# Altium PCB Filter_Main2.PcbDoc (part 2 of 2)
Units mm, origin at the board's own origin, x right, y up, seen from the top; angles counter-clockwise.
Board outline 175 x 90 mm, 2 copper layers (Top Layer, Bottom Layer); 103 components, 61 nets, 291 pads, 1 vias.
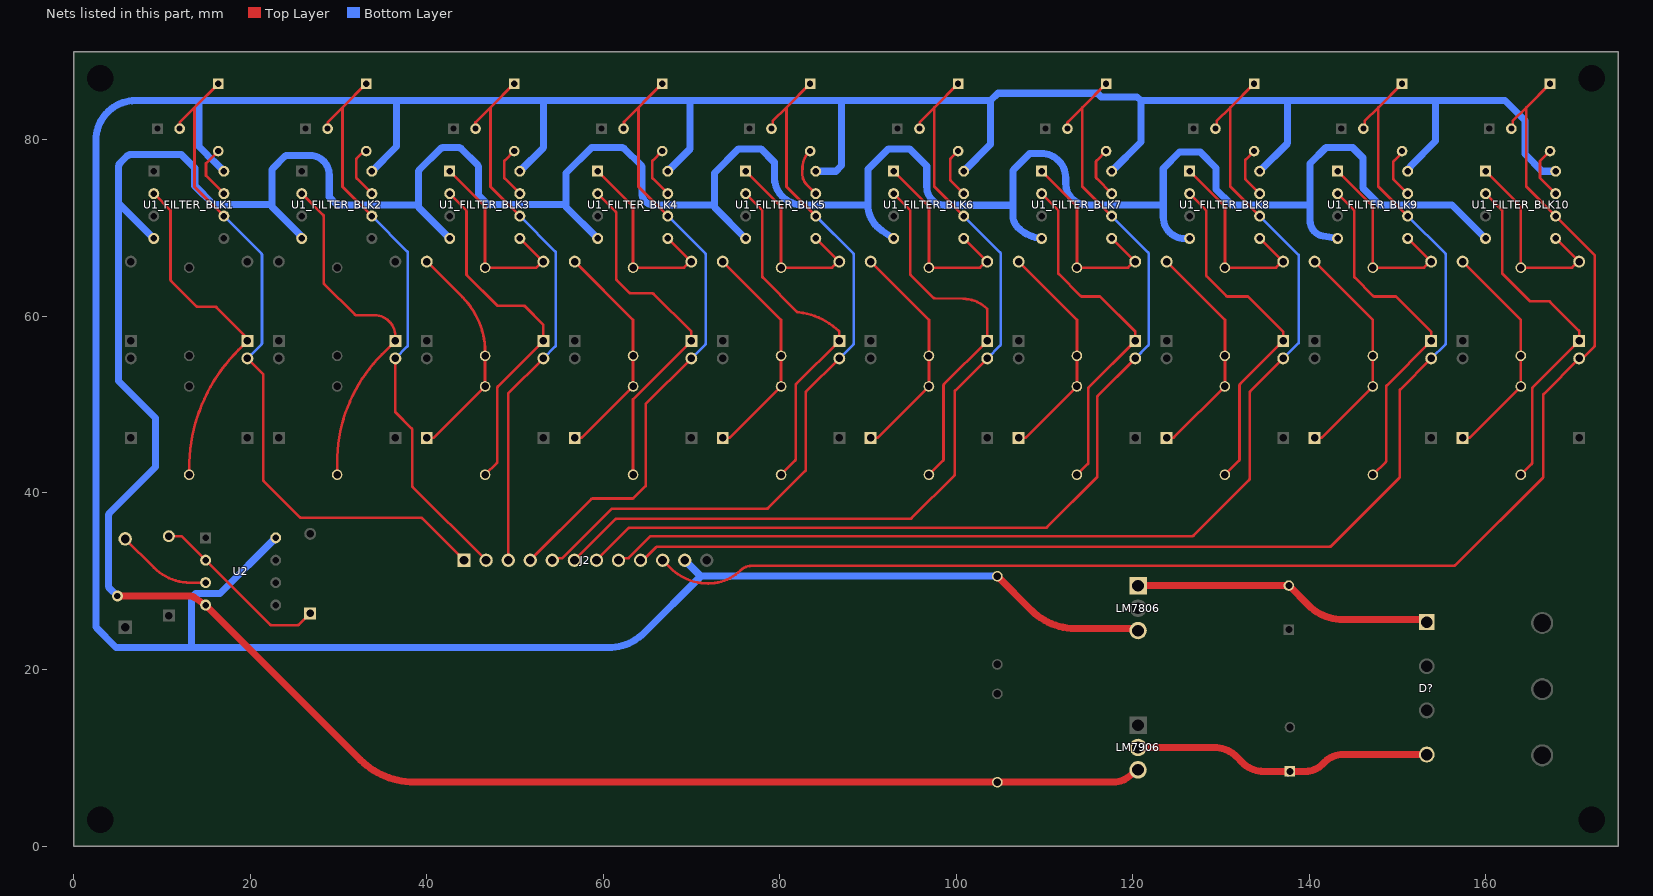
[diagram p2: the nets of this part, all layers, seen from the top]

## Via types
v1: diameter 1.27, hole 0.711, Top Layer to Bottom Layer, 1 vias

## Nets (pads, with @x,y where several pads share a name; then routed paths per layer and width w, separated by ;. In a path a pad name is that pad's centre, name@x,y a point inside that pad or via, vN(x,y) a via of type N, cw(c..) or ccw(c..) an arc to the next point about the centre after c; other vN are vias at no path point) (continued)
NetC1_FILTER_BLK3_1: C1_FILTER_BLK3.1 C2_FILTER_BLK3.1 R2_FILTER_BLK3.2 R3_FILTER_BLK3.1 | length 25.5
  Top Layer w0.3: R3_FILTER_BLK3.1@40.005,46.245 40.703,46.245 ccw(c40.703,46.439) 40.841,46.302 C2_FILTER_BLK3.1@46.609,52.07 46.609,55.989 ccw(c37.848,55.989) 44.042,62.185 ; R2_FILTER_BLK3.2@40.005,66.222 44.042,62.185
NetC1_FILTER_BLK3_2: C1_FILTER_BLK3.2 R1_FILTER_BLK3.2 U1_FILTER_BLK3.1 U1_FILTER_BLK3.5 | length 23.2
  Top Layer w0.3: U1_FILTER_BLK3.1@42.606,76.454 46.609,72.451 C1_FILTER_BLK3.2@46.609,65.532 52.41,65.532 53.1,66.222 R1_FILTER_BLK3.2@53.213,66.222 53.186,66.222 50.574,68.834 U1_FILTER_BLK3.5@50.546,68.834
NetC1_FILTER_BLK4_1: C1_FILTER_BLK4.1 C2_FILTER_BLK4.1 R2_FILTER_BLK4.2 R3_FILTER_BLK4.1 | length 25.9
  Top Layer w0.3: R3_FILTER_BLK4.1@56.769,46.245 57.467,46.245 ccw(c57.467,46.439) 57.605,46.302 C2_FILTER_BLK4.1@63.373,52.07 C1_FILTER_BLK4.1@63.373,55.532 63.373,59.618 R2_FILTER_BLK4.2@56.769,66.222
NetC1_FILTER_BLK4_2: C1_FILTER_BLK4.2 R1_FILTER_BLK4.2 U1_FILTER_BLK4.1 U1_FILTER_BLK4.5 | length 23.2
  Top Layer w0.3: U1_FILTER_BLK4.1@59.37,76.454 63.373,72.451 C1_FILTER_BLK4.2@63.373,65.532 69.174,65.532 69.864,66.222 R1_FILTER_BLK4.2@69.977,66.222 69.95,66.222 67.338,68.834 U1_FILTER_BLK4.5@67.31,68.834
NetC1_FILTER_BLK5_1: C1_FILTER_BLK5.1 C2_FILTER_BLK5.1 R2_FILTER_BLK5.2 R3_FILTER_BLK5.1 | length 25.9
  Top Layer w0.3: R3_FILTER_BLK5.1@73.533,46.245 74.231,46.245 ccw(c74.231,46.439) 74.369,46.302 C2_FILTER_BLK5.1@80.137,52.07 C1_FILTER_BLK5.1@80.137,55.532 80.137,59.618 R2_FILTER_BLK5.2@73.533,66.222
NetC1_FILTER_BLK5_2: C1_FILTER_BLK5.2 R1_FILTER_BLK5.2 U1_FILTER_BLK5.1 U1_FILTER_BLK5.5 | length 23.2
  Top Layer w0.3: U1_FILTER_BLK5.1@76.134,76.454 80.137,72.451 C1_FILTER_BLK5.2@80.137,65.532 85.938,65.532 86.628,66.222 R1_FILTER_BLK5.2@86.741,66.222 86.714,66.222 84.102,68.834 U1_FILTER_BLK5.5@84.074,68.834
NetC1_FILTER_BLK6_1: C1_FILTER_BLK6.1 C2_FILTER_BLK6.1 R2_FILTER_BLK6.2 R3_FILTER_BLK6.1 | length 25.9
  Top Layer w0.3: R3_FILTER_BLK6.1@90.297,46.245 90.995,46.245 ccw(c90.995,46.439) 91.133,46.302 C2_FILTER_BLK6.1@96.901,52.07 C1_FILTER_BLK6.1@96.901,55.532 96.901,59.618 R2_FILTER_BLK6.2@90.297,66.222
NetC1_FILTER_BLK6_2: C1_FILTER_BLK6.2 R1_FILTER_BLK6.2 U1_FILTER_BLK6.1 U1_FILTER_BLK6.5 | length 23.2
  Top Layer w0.3: U1_FILTER_BLK6.1@92.898,76.454 96.901,72.451 C1_FILTER_BLK6.2@96.901,65.532 102.702,65.532 103.392,66.222 R1_FILTER_BLK6.2@103.505,66.222 103.478,66.222 100.866,68.834 U1_FILTER_BLK6.5@100.838,68.834
NetC1_FILTER_BLK7_1: C1_FILTER_BLK7.1 C2_FILTER_BLK7.1 R2_FILTER_BLK7.2 R3_FILTER_BLK7.1 | length 25.9
  Top Layer w0.3: R3_FILTER_BLK7.1@107.061,46.245 107.759,46.245 ccw(c107.759,46.439) 107.897,46.302 C2_FILTER_BLK7.1@113.665,52.07 C1_FILTER_BLK7.1@113.665,55.532 113.665,59.618 R2_FILTER_BLK7.2@107.061,66.222
NetC1_FILTER_BLK7_2: C1_FILTER_BLK7.2 R1_FILTER_BLK7.2 U1_FILTER_BLK7.1 U1_FILTER_BLK7.5 | length 23.2
  Top Layer w0.3: U1_FILTER_BLK7.1@109.662,76.454 113.665,72.451 C1_FILTER_BLK7.2@113.665,65.532 119.466,65.532 120.156,66.222 R1_FILTER_BLK7.2@120.269,66.222 120.242,66.222 117.63,68.834 U1_FILTER_BLK7.5@117.602,68.834
NetC1_FILTER_BLK8_1: C1_FILTER_BLK8.1 C2_FILTER_BLK8.1 R2_FILTER_BLK8.2 R3_FILTER_BLK8.1 | length 25.9
  Top Layer w0.3: R3_FILTER_BLK8.1@123.825,46.245 124.35,46.261 124.552,46.267 ccw(c124.545,46.461) 124.682,46.323 C2_FILTER_BLK8.1@130.429,52.07 C1_FILTER_BLK8.1@130.429,55.532 130.429,59.618 R2_FILTER_BLK8.2@123.825,66.222
NetC1_FILTER_BLK8_2: C1_FILTER_BLK8.2 R1_FILTER_BLK8.2 U1_FILTER_BLK8.1 U1_FILTER_BLK8.5 | length 23.2
  Top Layer w0.3: U1_FILTER_BLK8.1@126.426,76.454 130.429,72.451 C1_FILTER_BLK8.2@130.429,65.532 136.23,65.532 136.92,66.222 R1_FILTER_BLK8.2@137.006,66.222 ; U1_FILTER_BLK8.5@134.366,68.834 134.394,68.834 R1_FILTER_BLK8.2@137.006,66.222 ; R1_FILTER_BLK8.2@137.033,66.222 R1_FILTER_BLK8.2@137.006,66.222
NetC1_FILTER_BLK9_1: C1_FILTER_BLK9.1 C2_FILTER_BLK9.1 R2_FILTER_BLK9.2 R3_FILTER_BLK9.1 | length 25.9
  Top Layer w0.3: R3_FILTER_BLK9.1@140.589,46.245 141.287,46.245 ccw(c141.287,46.439) 141.425,46.302 C2_FILTER_BLK9.1@147.193,52.07 C1_FILTER_BLK9.1@147.193,55.532 147.193,59.618 R2_FILTER_BLK9.2@140.589,66.222
NetC1_FILTER_BLK9_2: C1_FILTER_BLK9.2 R1_FILTER_BLK9.2 U1_FILTER_BLK9.1 U1_FILTER_BLK9.5 | length 23.2
  Top Layer w0.3: U1_FILTER_BLK9.1@143.19,76.454 147.193,72.451 C1_FILTER_BLK9.2@147.193,65.532 152.994,65.532 153.684,66.222 R1_FILTER_BLK9.2@153.797,66.222 153.77,66.222 151.158,68.834 U1_FILTER_BLK9.5@151.13,68.834
NetC1_FILTER_BLK10_1: C1_FILTER_BLK10.1 C2_FILTER_BLK10.1 R2_FILTER_BLK10.2 R3_FILTER_BLK10.1 | length 25.9
  Top Layer w0.3: R3_FILTER_BLK10.1@157.353,46.245 158.051,46.245 ccw(c158.051,46.439) 158.189,46.302 C2_FILTER_BLK10.1@163.957,52.07 C1_FILTER_BLK10.1@163.957,55.532 163.957,59.618 R2_FILTER_BLK10.2@157.353,66.222
NetC1_FILTER_BLK10_2: C1_FILTER_BLK10.2 R1_FILTER_BLK10.2 U1_FILTER_BLK10.1 U1_FILTER_BLK10.5 | length 23.2
  Top Layer w0.3: U1_FILTER_BLK10.1@159.954,76.454 163.957,72.451 C1_FILTER_BLK10.2@163.957,65.532 169.758,65.532 170.448,66.222 R1_FILTER_BLK10.2@170.561,66.222 170.534,66.222 167.922,68.834 U1_FILTER_BLK10.5@167.894,68.834
NetC2_FILTER_BLK1_2: C2_FILTER_BLK1.2 R1_FILTER_BLK1.1 U1_FILTER_BLK1.2 | length 39.7
  Top Layer w0.3: U1_FILTER_BLK1.2@9.345,73.684 ccw(c9.15,73.674) 9.225,73.853 U1_FILTER_BLK1.2@9.078,73.914 10.971,72.021 10.971,64.165 ccw(c11.166,64.166) 11.028,64.029 13.914,61.143 ccw(c14.051,61.281) 14.049,61.087 16.048,61.087 cw(c16.048,60.893) 16.186,61.03 19.469,57.747 R1_FILTER_BLK1.1@19.685,57.222 18.657,56.194 ccw(c32.119,42.732) 13.081,42.731 C2_FILTER_BLK1.2@13.081,42.07
NetC2_FILTER_BLK2_2: C2_FILTER_BLK2.2 R1_FILTER_BLK2.1 U1_FILTER_BLK2.2 | length 39.8
  Top Layer w0.3: U1_FILTER_BLK2.2@25.842,73.914 28.264,71.501 cw(c28.127,71.363) 28.321,71.363 28.321,63.834 ccw(c28.515,63.835) 28.377,63.698 31.877,60.198 ccw(c32.014,60.335) 32.014,60.141 34.055,60.141 cw(c34.055,57.747) 36.449,57.747 R1_FILTER_BLK2.1@36.449,57.222 34.935,55.708 ccw(c47.223,43.42) 29.845,43.419 C2_FILTER_BLK2.2@29.845,42.07
NetC2_FILTER_BLK3_2: C2_FILTER_BLK3.2 R1_FILTER_BLK3.1 U1_FILTER_BLK3.2 | length 40.7
  Top Layer w0.3: U1_FILTER_BLK3.2@42.606,73.914 44.443,72.077 cw(c44.305,71.94) 44.499,71.94 44.499,64.801 ccw(c44.694,64.801) 44.556,64.664 47.949,61.271 ccw(c48.087,61.408) 48.087,61.214 50.973,61.214 cw(c50.973,61.02) 51.111,61.157 53.156,59.112 cw(c53.019,58.974) 53.213,58.974 R1_FILTER_BLK3.1@53.213,57.222 48.063,52.072 ccw(c48.2,51.934) 48.006,51.934 48.006,43.548 cw(c47.812,43.548) 47.949,43.41 C2_FILTER_BLK3.2@46.609,42.07
NetC2_FILTER_BLK4_2: C2_FILTER_BLK4.2 R1_FILTER_BLK4.1 U1_FILTER_BLK4.2 | length 40.5
  Top Layer w0.3: U1_FILTER_BLK4.2@59.37,73.914 61.411,71.873 cw(c61.274,71.735) 61.468,71.735 61.468,64.263 ccw(c61.662,64.263) 61.525,64.126 62.982,62.668 ccw(c63.12,62.805) 63.12,62.611 65.563,62.611 cw(c65.563,62.417) 65.701,62.554 69.977,58.278 R1_FILTER_BLK4.1@69.977,57.222 63.373,50.618 C2_FILTER_BLK4.2@63.373,42.07
NetC2_FILTER_BLK5_2: C2_FILTER_BLK5.2 R1_FILTER_BLK5.1 U1_FILTER_BLK5.2 | length 40.1
  Top Layer w0.3: U1_FILTER_BLK5.2@76.134,73.914 77.971,72.077 cw(c77.833,71.94) 78.027,71.94 78.027,64.546 ccw(c78.222,64.547) 78.084,64.41 81.966,60.528 ccw(c82.103,60.666) 82.082,60.473 82.181,60.462 cw(c81.375,52.926) 86.683,58.335 cw(c86.547,58.197) 86.741,58.197 R1_FILTER_BLK5.1@86.741,57.222 81.845,52.326 ccw(c81.982,52.188) 81.788,52.188 81.788,43.802 cw(c81.594,43.802) 81.731,43.664 C2_FILTER_BLK5.2@80.137,42.07
NetC2_FILTER_BLK6_2: C2_FILTER_BLK6.2 R1_FILTER_BLK6.1 U1_FILTER_BLK6.2 | length 41.6
  Top Layer w0.3: U1_FILTER_BLK6.2@92.898,73.914 94.735,72.077 cw(c94.597,71.94) 94.791,71.94 94.791,64.8 ccw(c94.986,64.801) 94.848,64.664 97.408,62.104 ccw(c97.545,62.242) 97.54,62.048 ; C2_FILTER_BLK6.2@96.901,42.07 98.495,43.664 ccw(c98.358,43.802) 98.552,43.802 98.552,52.188 cw(c98.746,52.188) 98.609,52.326 R1_FILTER_BLK6.1@103.505,57.222 103.505,60.752 ccw(c103.311,60.752) 103.448,60.89 ccw(c100.778,58.202) 100.769,61.991 cw(c100.769,62.185) 100.765,61.991 97.541,62.048
NetC2_FILTER_BLK7_2: C2_FILTER_BLK7.2 R1_FILTER_BLK7.1 U1_FILTER_BLK7.2 | length 40.2
  Top Layer w0.3: U1_FILTER_BLK7.2@109.662,73.914 111.499,72.077 cw(c111.361,71.94) 111.555,71.94 111.555,64.928 ccw(c111.75,64.928) 111.612,64.791 114.08,62.323 ccw(c114.217,62.461) 114.217,62.266 116.281,62.266 120.269,58.278 R1_FILTER_BLK7.1@120.269,57.222 114.992,51.945 ccw(c115.129,51.807) 114.935,51.807 114.935,43.421 cw(c114.741,43.421) 114.878,43.283 C2_FILTER_BLK7.2@113.665,42.07
NetC2_FILTER_BLK8_2: C2_FILTER_BLK8.2 R1_FILTER_BLK8.1 U1_FILTER_BLK8.2 | length 40.3
  Top Layer w0.3: U1_FILTER_BLK8.2@126.426,73.914 128.263,72.077 cw(c128.125,71.94) 128.319,71.94 128.319,64.674 ccw(c128.514,64.674) 128.376,64.537 130.59,62.323 ccw(c130.727,62.461) 130.727,62.266 133.045,62.266 137.033,58.278 R1_FILTER_BLK8.1@137.033,57.222 132.137,52.326 ccw(c132.274,52.188) 132.08,52.188 132.08,43.802 cw(c131.886,43.802) 132.023,43.664 C2_FILTER_BLK8.2@130.429,42.07
NetC2_FILTER_BLK9_2: C2_FILTER_BLK9.2 R1_FILTER_BLK9.1 U1_FILTER_BLK9.2 | length 40.4
  Top Layer w0.3: U1_FILTER_BLK9.2@143.19,73.914 145.027,72.077 cw(c144.889,71.94) 145.083,71.94 145.083,64.547 ccw(c145.278,64.547) 145.14,64.41 147.227,62.323 ccw(c147.364,62.461) 147.364,62.266 149.809,62.266 153.797,58.278 R1_FILTER_BLK9.1@153.797,57.222 148.774,52.199 ccw(c148.911,52.061) 148.717,52.061 148.717,43.675 cw(c148.523,43.675) 148.66,43.537 C2_FILTER_BLK9.2@147.193,42.07
NetC2_FILTER_BLK10_2: C2_FILTER_BLK10.2 R1_FILTER_BLK10.1 U1_FILTER_BLK10.2 | length 40.2
  Top Layer w0.3: U1_FILTER_BLK10.2@159.954,73.914 161.791,72.077 cw(c161.653,71.94) 161.847,71.94 161.847,64.928 ccw(c162.042,64.928) 161.904,64.791 164.916,61.779 ccw(c165.054,61.916) 165.054,61.722 167.132,61.722 cw(c167.132,61.528) 167.269,61.665 170.504,58.43 cw(c170.367,58.293) 170.561,58.293 R1_FILTER_BLK10.1@170.561,57.222 165.284,51.945 ccw(c165.421,51.807) 165.227,51.808 165.227,43.421 cw(c165.033,43.421) 165.17,43.283 C2_FILTER_BLK10.2@163.957,42.07
NetCE1_2: CE1.2 D?.1 LM7806.1 | length 34.2
  Top Layer w0.8: LM7806.1@120.587,29.483 120.601,29.497 137.654,29.497 CE1.2@137.668,29.511 139.895,27.284 ccw(c140.463,27.848) 139.898,27.281 139.899,27.28 ccw(c143.843,31.25) 143.827,25.654 152.789,25.654 D?.1@153.289,25.367 ; LM7806.1@120.904,29.454 LM7806.1@120.933,29.482
NetCE2_1: CE2.1 D?.4 LM7906.2 | length 34.4
  Top Layer w0.8: LM7906.2@120.587,11.171 129.212,11.171 129.216,11.171 cw(c129.215,7.614) 131.731,10.128 131.732,10.127 132.391,9.468 132.394,9.465 ccw(c134.817,11.89) 134.819,8.462 137.995,8.462 139.554,8.462 ccw(c139.554,11.154) 141.455,9.248 141.703,9.496 cw(c143.81,7.383) 143.811,10.367 ; 143.812,10.367 D?.4@153.289,10.367
  Bottom Layer w0.8: CE2.1@137.588,8.255 CE2.1@137.795,8.462
NetD1_FILTER_BLK1_2: D1_FILTER_BLK1.2 U1_FILTER_BLK1.7 | length 6.2
  Top Layer w0.3: D1_FILTER_BLK1.2@16.383,78.737 14.986,77.34 14.986,75.946 U1_FILTER_BLK1.7@17.018,73.914
NetD1_FILTER_BLK2_2: D1_FILTER_BLK2.2 U1_FILTER_BLK2.7 | length 6.2
  Top Layer w0.3: D1_FILTER_BLK2.2@33.147,78.737 32.903,78.737 32.633,78.467 32.62,78.467 32.092,77.939 ccw(c32.304,77.727) 32.004,77.727 32.004,75.816 ccw(c32.304,75.816) 32.091,75.605 U1_FILTER_BLK2.7@33.782,73.914
NetD1_FILTER_BLK3_2: D1_FILTER_BLK3.2 U1_FILTER_BLK3.7 | length 6
  Top Layer w0.3: D1_FILTER_BLK3.2@49.911,78.737 48.856,77.682 ccw(c49.068,77.47) 48.768,77.47 48.768,75.816 ccw(c49.068,75.816) 48.855,75.605 U1_FILTER_BLK3.7@50.546,73.914
NetD1_FILTER_BLK4_2: D1_FILTER_BLK4.2 U1_FILTER_BLK4.7 | length 6
  Top Layer w0.3: D1_FILTER_BLK4.2@66.675,78.737 65.62,77.682 ccw(c65.832,77.47) 65.532,77.47 65.532,75.816 ccw(c65.832,75.816) 65.619,75.605 U1_FILTER_BLK4.7@67.31,73.914
NetD1_FILTER_BLK5_2: D1_FILTER_BLK5.2 U1_FILTER_BLK5.7 | length 5.6
  Top Layer w0.3: D1_FILTER_BLK5.2@83.447,78.727 ccw(c84.935,76.896) 82.576,76.977 cw(c82.277,76.986) 82.576,76.975 82.55,76.2 ccw(c84.259,76.147) 83.051,74.937 U1_FILTER_BLK5.7@84.074,73.914
NetD1_FILTER_BLK6_2: D1_FILTER_BLK6.2 U1_FILTER_BLK6.7 | length 5.8
  Top Layer w0.3: D1_FILTER_BLK6.2@100.203,78.737 99.402,77.936 ccw(c99.614,77.724) 99.314,77.724 99.314,75.562 ccw(c99.614,75.562) 99.401,75.351 U1_FILTER_BLK6.7@100.838,73.914
NetD1_FILTER_BLK7_2: D1_FILTER_BLK7.2 U1_FILTER_BLK7.7 | length 6
  Top Layer w0.3: D1_FILTER_BLK7.2@116.967,78.737 115.912,77.682 ccw(c116.124,77.47) 115.824,77.47 115.824,75.816 ccw(c116.124,75.816) 115.911,75.605 U1_FILTER_BLK7.7@117.602,73.914
NetD1_FILTER_BLK8_2: D1_FILTER_BLK8.2 U1_FILTER_BLK8.7 | length 5.9
  Top Layer w0.3: D1_FILTER_BLK8.2@133.731,78.737 132.803,77.809 ccw(c133.015,77.597) 132.715,77.597 132.715,75.689 ccw(c133.015,75.689) 132.802,75.478 U1_FILTER_BLK8.7@134.366,73.914
NetD1_FILTER_BLK9_2: D1_FILTER_BLK9.2 U1_FILTER_BLK9.7 | length 5.9
  Top Layer w0.3: D1_FILTER_BLK9.2@150.495,78.737 150.495,78.543 149.567,77.615 ccw(c149.779,77.403) 149.479,77.403 149.479,75.689 ccw(c149.779,75.689) 149.566,75.478 U1_FILTER_BLK9.7@151.13,73.914
NetD1_FILTER_BLK10_2: D1_FILTER_BLK10.2 U1_FILTER_BLK10.7 | length 6
  Top Layer w0.3: D1_FILTER_BLK10.2@167.259,78.737 166.116,77.594 166.116,75.692 U1_FILTER_BLK10.7@167.894,73.914
NetP_B1: P.B1 U2.3 | length 10.9
  Top Layer w0.3: P.B1@5.842,34.798 9.097,31.543 9.098,31.542 ccw(c13.195,35.64) 13.196,29.845 U2.3@14.953,29.845
NetR5_1: R5.1 R6.2 U2.2 | length 20.7
  Top Layer w0.3: R6.2@10.795,35.107 12.231,35.107 U2.2@14.953,32.385 22.262,25.076 ccw(c22.4,25.213) 22.4,25.019 25.374,25.019 ccw(c25.374,25.213) 25.512,25.076 R5.1@26.797,26.361
PI1: C3_FILTER_BLK1.2 D1_FILTER_BLK1.1 J2.1 R4_FILTER_BLK1.2 U1_FILTER_BLK1.6 | length 80.2
  Top Layer w0.3: C3_FILTER_BLK1.2@12.005,81.28 12.005,81.985 13.696,83.676 ; D1_FILTER_BLK1.1@16.383,86.363 13.696,83.676 ; U1_FILTER_BLK1.6@17.018,71.374 13.696,74.696 13.696,83.676 ; R4_FILTER_BLK1.2@19.685,55.245 21.463,53.467 21.463,41.482 ccw(c21.657,41.483) 21.519,41.346 25.598,37.267 ccw(c25.735,37.405) 25.733,37.211 39.322,37.211 cw(c39.322,37.017) 39.46,37.154 J2.1@44.229,32.385
  Bottom Layer w0.3: U1_FILTER_BLK1.6@17.018,71.374 21.279,67.113 cw(c21.142,66.975) 21.336,66.975 21.336,56.977 cw(c21.142,56.977) 21.279,56.839 R4_FILTER_BLK1.2@19.685,55.245
PI2: C3_FILTER_BLK2.2 D1_FILTER_BLK2.1 J2.2 R4_FILTER_BLK2.2 U1_FILTER_BLK2.6 | length 66
  Top Layer w0.3: C3_FILTER_BLK2.2@28.769,81.28 28.769,81.985 30.46,83.676 ; D1_FILTER_BLK2.1@33.147,86.363 30.46,83.676 ; U1_FILTER_BLK2.6@33.782,71.374 30.46,74.696 30.46,83.676 ; R4_FILTER_BLK2.2@36.449,55.245 36.449,49.229 ccw(c36.643,49.23) 36.506,49.092 38.297,47.301 cw(c38.16,47.163) 38.354,47.163 38.354,40.841 ccw(c38.548,40.841) 38.411,40.703 J2.2@46.729,32.385
  Bottom Layer w0.3: U1_FILTER_BLK2.6@33.782,71.374 37.789,67.367 cw(c37.652,67.229) 37.846,67.229 37.846,56.723 cw(c37.652,56.723) 37.789,56.585 R4_FILTER_BLK2.2@36.449,55.245
PI3: C3_FILTER_BLK3.2 D1_FILTER_BLK3.1 J2.3 R4_FILTER_BLK3.2 U1_FILTER_BLK3.6 | length 63.5
  Top Layer w0.3: C3_FILTER_BLK3.2@45.533,81.28 45.533,81.985 47.224,83.676 ; J2.3@49.229,32.385 49.229,51.261 R4_FILTER_BLK3.2@53.213,55.245 ; D1_FILTER_BLK3.1@49.911,86.363 47.224,83.676 ; U1_FILTER_BLK3.6@50.546,71.374 47.224,74.696 47.224,83.676
  Bottom Layer w0.3: U1_FILTER_BLK3.6@50.546,71.374 54.553,67.367 cw(c54.416,67.229) 54.61,67.229 54.61,56.723 cw(c54.416,56.723) 54.553,56.585 R4_FILTER_BLK3.2@53.213,55.245
PI4: C3_FILTER_BLK4.2 D1_FILTER_BLK4.1 J2.4 R4_FILTER_BLK4.2 U1_FILTER_BLK4.6 | length 72.2
  Top Layer w0.3: J2.4@51.729,32.385 58.657,39.313 cw(c58.795,39.176) 58.795,39.37 63.292,39.37 ccw(c63.292,39.564) 63.43,39.427 64.801,40.798 64.801,50.069 R4_FILTER_BLK4.2@69.977,55.245 ; C3_FILTER_BLK4.2@62.357,81.34 62.357,82.045 D1_FILTER_BLK4.1@66.675,86.363 ; 63.988,83.566 63.988,74.696 U1_FILTER_BLK4.6@67.31,71.374
  Top Layer w0.8: C3_FILTER_BLK4.2@62.297,81.28 C3_FILTER_BLK4.2@62.357,81.34
  Bottom Layer w0.3: U1_FILTER_BLK4.6@67.31,71.374 71.571,67.113 cw(c71.434,66.975) 71.628,66.975 71.628,56.977 cw(c71.434,56.977) 71.571,56.839 R4_FILTER_BLK4.2@69.977,55.245
PI5: C3_FILTER_BLK5.2 D1_FILTER_BLK5.1 J2.5 R4_FILTER_BLK5.2 U1_FILTER_BLK5.6 | length 86.3
  Top Layer w0.3: J2.5@54.229,32.385 54.469,32.625 55.364,32.625 60.909,38.17 cw(c61.046,38.033) 61.046,38.227 78.532,38.227 ccw(c78.532,38.421) 78.67,38.284 82.874,42.488 ccw(c82.737,42.626) 82.931,42.626 82.931,51.354 cw(c83.125,51.354) 82.988,51.492 R4_FILTER_BLK5.2@86.741,55.245 ; C3_FILTER_BLK5.2@79.061,81.28 79.199,81.418 79.199,82.123 80.752,83.676 ; D1_FILTER_BLK5.1@83.439,86.363 80.752,83.676 ; U1_FILTER_BLK5.6@84.074,71.374 80.752,74.696 80.752,83.676
  Bottom Layer w0.3: U1_FILTER_BLK5.6@84.074,71.374 88.335,67.113 cw(c88.198,66.975) 88.392,66.975 88.392,56.977 cw(c88.198,56.977) 88.335,56.839 R4_FILTER_BLK5.2@86.741,55.245
PI6: C3_FILTER_BLK6.2 D1_FILTER_BLK6.1 J2.6 R4_FILTER_BLK6.2 U1_FILTER_BLK6.6 | length 100.8
  Top Layer w0.3: J2.6@56.729,32.385 61.371,37.027 cw(c61.509,36.89) 61.509,37.084 94.788,37.084 ccw(c94.788,37.278) 94.926,37.141 99.765,41.98 ccw(c99.628,42.118) 99.822,42.118 99.822,51.481 cw(c100.016,51.481) 99.879,51.619 R4_FILTER_BLK6.2@103.505,55.245 ; C3_FILTER_BLK6.2@95.825,81.28 ccw(c95.644,81.352) 95.839,81.352 95.839,81.918 cw(c96.033,81.918) 95.896,82.056 97.516,83.676 ; D1_FILTER_BLK6.1@100.203,86.363 97.516,83.676 ; U1_FILTER_BLK6.6@100.838,71.374 97.516,74.696 97.516,83.676
  Bottom Layer w0.3: U1_FILTER_BLK6.6@100.838,71.374 104.972,67.24 cw(c104.835,67.102) 105.029,67.102 105.029,56.85 cw(c104.835,56.85) 104.972,56.712 R4_FILTER_BLK6.2@103.505,55.245
PI7: C3_FILTER_BLK7.2 D1_FILTER_BLK7.1 J2.7 R4_FILTER_BLK7.2 U1_FILTER_BLK7.6 | length 114.9
  Top Layer w0.3: J2.7@59.229,32.385 62.855,36.011 cw(c62.993,35.874) 62.993,36.068 110.155,36.068 ccw(c110.155,36.262) 110.293,36.125 115.894,41.726 ccw(c115.757,41.864) 115.951,41.864 115.951,50.846 cw(c116.145,50.846) 116.008,50.984 R4_FILTER_BLK7.2@120.269,55.245 ; C3_FILTER_BLK7.2@112.589,81.28 112.589,81.904 cw(c112.783,81.904) 112.646,82.042 114.28,83.676 ; D1_FILTER_BLK7.1@116.967,86.363 114.28,83.676 ; U1_FILTER_BLK7.6@117.602,71.374 114.28,74.696 114.28,83.676
  Bottom Layer w0.3: U1_FILTER_BLK7.6@117.602,71.374 121.736,67.24 cw(c121.599,67.102) 121.793,67.102 121.793,56.85 cw(c121.599,56.85) 121.736,56.712 R4_FILTER_BLK7.2@120.269,55.245
PI8: C3_FILTER_BLK8.2 D1_FILTER_BLK8.1 J2.8 R4_FILTER_BLK8.2 U1_FILTER_BLK8.6 | length 129.8
  Top Layer w0.3: J2.8@61.729,32.385 61.969,32.625 62.864,32.625 65.351,35.112 126.726,35.112 ccw(c126.726,35.307) 126.863,35.169 133.166,41.472 ccw(c133.029,41.61) 133.223,41.61 133.223,51.354 cw(c133.417,51.354) 133.28,51.492 R4_FILTER_BLK8.2@137.033,55.245 ; C3_FILTER_BLK8.2@129.353,81.28 129.491,81.418 129.491,82.123 131.044,83.676 ; D1_FILTER_BLK8.1@133.731,86.363 131.044,83.676 ; U1_FILTER_BLK8.6@134.366,71.374 131.044,74.696 131.044,83.676
  Bottom Layer w0.3: U1_FILTER_BLK8.6@134.366,71.374 138.754,66.986 cw(c138.617,66.848) 138.811,66.848 138.811,57.104 cw(c138.617,57.104) 138.754,56.966 R4_FILTER_BLK8.2@137.033,55.245
PI9: C3_FILTER_BLK9.2 D1_FILTER_BLK9.1 J2.9 R4_FILTER_BLK9.2 U1_FILTER_BLK9.6 | length 143.9
  Top Layer w0.3: J2.9@64.229,32.385 64.412,32.568 cw(c64.549,32.43) 64.549,32.625 64.675,32.625 ccw(c64.675,32.819) 64.813,32.682 65.983,33.852 cw(c66.121,33.715) 66.121,33.909 142.286,33.909 ccw(c142.286,34.103) 142.424,33.966 150.184,41.726 ccw(c150.047,41.864) 150.241,41.864 150.241,51.608 cw(c150.435,51.608) 150.298,51.746 R4_FILTER_BLK9.2@153.797,55.245 ; C3_FILTER_BLK9.2@146.117,81.28 146.255,81.418 146.255,82.123 147.808,83.676 ; D1_FILTER_BLK9.1@150.495,86.363 147.808,83.676 ; U1_FILTER_BLK9.6@151.13,71.374 147.808,74.696 147.808,83.676
  Bottom Layer w0.3: U1_FILTER_BLK9.6@151.13,71.374 155.391,67.113 cw(c155.254,66.975) 155.448,66.975 155.448,56.977 cw(c155.254,56.977) 155.391,56.839 R4_FILTER_BLK9.2@153.797,55.245
PI10: C3_FILTER_BLK10.2 D1_FILTER_BLK10.1 J2.10 R4_FILTER_BLK10.2 U1_FILTER_BLK10.6 | length 159.9
  Top Layer w0.3: J2.10@66.729,32.385 67.554,31.56 ccw(c71.883,35.821) 71.882,29.747 ccw(c71.883,35.027) 75.565,31.242 cw(c76.82,29.946) 76.821,31.75 156.34,31.75 ccw(c156.34,32.05) 156.552,31.838 166.44,41.726 ccw(c166.303,41.864) 166.497,41.864 166.497,51.1 cw(c166.691,51.1) 166.554,51.238 R4_FILTER_BLK10.2@170.561,55.245 170.861,55.245 ccw(c170.861,55.439) 170.999,55.302 172.282,56.585 ccw(c172.145,56.723) 172.339,56.723 172.339,66.848 ccw(c172.145,66.848) 172.282,66.986 U1_FILTER_BLK10.6@167.894,71.374 164.572,74.696 164.572,83.676 ; C3_FILTER_BLK10.2@162.881,81.28 163.019,81.418 163.019,82.123 164.572,83.676 ; D1_FILTER_BLK10.1@167.259,86.363 164.572,83.676
Vs+: "100 nF_1.2" J2.11 LM7806.3 U1_FILTER_BLK1.8 U1_FILTER_BLK2.8 U1_FILTER_BLK3.8 U1_FILTER_BLK4.8 U1_FILTER_BLK5.8 U1_FILTER_BLK6.8 U1_FILTER_BLK7.8 U1_FILTER_BLK8.8 U1_FILTER_BLK9.8 U1_FILTER_BLK10.8 U2.8 | length 458.8
  Top Layer w0.8: 104.648,30.574 108.518,26.704 ccw(c113.455,31.637) 113.457,24.658 120.011,24.658 cw(c120.011,23.858) 120.576,24.424 LM7806.3@120.587,24.413
  Bottom Layer w0.8: U1_FILTER_BLK1.8@17.018,76.454 15.935,77.537 15.886,77.537 15.183,78.24 15.183,78.289 14.199,79.273 14.199,84.455 ; U2.8@22.893,34.925 16.589,28.621 13.802,28.621 13.329,28.148 13.329,22.923 ccw(c13.773,22.923) 13.773,22.479 ; U1_FILTER_BLK2.8@33.782,76.454 36.576,79.248 36.576,84.455 ; U1_FILTER_BLK3.8@50.546,76.454 53.213,79.121 53.213,84.455 ; U1_FILTER_BLK4.8@67.31,76.454 69.85,78.994 69.85,84.455 ; J2.11@69.229,32.385 71.04,30.574 ; U1_FILTER_BLK5.8@84.074,76.454 86.36,76.454 86.995,77.089 86.995,84.455 ; U1_FILTER_BLK6.8@100.838,76.454 103.886,79.502 103.886,84.455 ; 104.648,30.574 71.04,30.574 ; U1_FILTER_BLK7.8@117.602,76.454 120.904,79.756 120.904,84.455 ; U1_FILTER_BLK8.8@134.366,76.454 137.541,79.629 137.541,84.455 ; U1_FILTER_BLK9.8@151.13,76.454 151.13,76.654 151.475,76.999 151.475,77.053 154.305,79.883 154.305,84.455 ; U1_FILTER_BLK10.8@167.894,76.454 166.37,76.454 164.427,78.397 164.427,82.207 162.179,84.455 154.305,84.455 ; 13.773,22.479 60.586,22.479 ccw(c60.588,28.17) 64.607,24.141 71.04,30.574 ; 13.773,22.479 5.01,22.479 cw(c5.01,22.923) 4.696,22.609 2.67,24.635 cw(c2.984,24.949) 2.54,24.949 2.54,79.999 cw(c6.99,80.005) 6.98,84.455 14.199,84.455 ; 14.199,84.455 36.576,84.455 ; 36.576,84.455 53.213,84.455 ; 53.213,84.455 69.85,84.455 ; 69.85,84.455 86.995,84.455 ; 86.995,84.455 103.886,84.455 ; 103.886,84.455 104.718,85.287 115.995,85.287 116.411,84.871 120.488,84.871 120.904,84.455 ; 120.904,84.455 137.541,84.455 ; 137.541,84.455 154.305,84.455
Vs-: "100 nF_2.1" LM7906.3 U1_FILTER_BLK1.4 U1_FILTER_BLK2.4 U1_FILTER_BLK3.4 U1_FILTER_BLK4.4 U1_FILTER_BLK5.4 U1_FILTER_BLK6.4 U1_FILTER_BLK7.4 U1_FILTER_BLK8.4 U1_FILTER_BLK9.4 U1_FILTER_BLK10.4 U2.4 | length 459.6
  Top Layer w0.8: v1(4.953,28.321) 13.188,28.321 cw(c13.188,27.521) 13.632,28.186 U2.4@14.953,27.305 32.456,9.802 32.465,9.793 ccw(c38.577,15.877) 38.579,7.253 63.109,7.253 104.634,7.253 ; 104.648,7.239 117.838,7.239 ccw(c117.84,9.797) 119.349,7.732 LM7906.3@120.587,8.636
  Bottom Layer w0.8: 4.067,29.207 v1(4.953,28.321) ; 4.067,29.207 cw(c4.381,29.521) 3.937,29.521 3.937,37.416 cw(c4.381,37.416) 4.067,37.73 9.271,42.934 9.271,48.514 5.08,52.705 5.08,72.832 ; U1_FILTER_BLK1.4@9.078,68.834 5.08,72.832 ; U1_FILTER_BLK2.4@25.842,68.834 25.842,68.955 25.618,69.179 25.618,69.286 22.479,72.425 22.479,72.69 ; U1_FILTER_BLK3.4@42.606,68.834 39.061,72.379 39.061,72.644 ; 45.977,73.657 46.944,72.69 55.795,72.69 ; 45.977,73.657 cw(c46.291,73.971) 45.847,73.971 45.847,76.905 ccw(c45.403,76.905) 45.717,77.219 43.945,78.991 ccw(c43.631,78.677) 43.631,79.121 41.84,79.121 ccw(c41.84,78.677) 41.526,78.991 39.191,76.656 ccw(c39.505,76.342) 39.061,76.342 39.061,72.644 ; U1_FILTER_BLK4.4@59.37,68.834 55.795,72.409 55.795,72.69 ; U1_FILTER_BLK5.4@76.134,68.834 72.589,72.379 72.589,72.644 ; 89.573,72.644 82.55,72.644 cw(c82.55,75.819) 79.375,75.819 79.375,77.47 77.851,78.994 75.311,78.994 72.589,76.272 72.589,72.644 ; U1_FILTER_BLK6.4@92.898,68.834 91.519,69.765 cw(c93.462,72.642) 90.013,72.25 90.013,76.678 92.329,78.994 94.687,78.994 96.647,77.034 96.647,74.676 ccw(c98.725,74.676) 98.725,72.598 106.426,72.598 ; 106.556,76.711 108.315,78.47 109.617,78.47 cw(c109.617,75.692) 112.395,75.692 112.395,75.057 ccw(c114.808,75.057) 114.808,72.644 123.444,72.644 ; 106.556,76.711 ccw(c106.87,76.397) 106.426,76.397 106.426,72.598 ; U1_FILTER_BLK7.4@109.611,68.834 cw(c110.087,73.252) 106.945,70.11 cw(c108.197,71.362) 106.426,71.365 106.426,72.598 ; U1_FILTER_BLK8.4@126.426,68.834 125.857,68.834 cw(c125.857,71.247) 123.444,71.247 123.444,72.644 ; 131.061,72.774 129.437,74.398 129.436,74.399 129.436,76.812 127.635,78.613 125.279,78.613 123.444,76.778 123.444,72.644 ; 131.061,72.774 ccw(c131.375,73.088) 131.375,72.644 140.081,72.644 ; U1_FILTER_BLK9.4@143.19,68.834 141.545,69.108 cw(c141.834,70.837) 140.081,70.841 140.081,72.644 ; 147.825,72.774 146.05,74.549 146.05,77.978 144.907,79.121 141.859,79.121 140.081,77.343 140.081,72.644 ; 147.825,72.774 ccw(c148.139,73.088) 148.139,72.644 155.96,72.644 cw(c155.96,72.2) 156.274,72.514 U1_FILTER_BLK10.4@159.954,68.834 ; 5.08,72.832 5.08,76.885 cw(c5.88,76.885) 5.314,77.45 5.989,78.125 cw(c6.554,77.559) 6.554,78.359 12.192,78.359 13.716,76.835 13.716,74.803 15.829,72.69 22.479,72.69 ; 22.479,72.69 22.479,76.524 cw(c22.923,76.524) 22.609,76.838 23.873,78.102 cw(c24.187,77.788) 24.187,78.232 26.797,78.232 cw(c26.797,76.073) 28.956,76.073 28.956,73.533 29.845,72.644 39.061,72.644 ; 55.795,72.69 55.795,76.242 58.674,79.121 62.103,79.121 cw(c62.103,78.677) 62.417,78.991 64.259,77.149 cw(c63.945,76.835) 64.389,76.835 64.389,73.914 ccw(c65.659,73.914) 65.659,72.644 72.589,72.644
pads on no net: U2.5 U2.6 U2.7

## Silkscreen, mask and mechanical layers (free items; w line width, h text height)
Top Overlay:
  lines w0.254: 2,2 173,2 173,88 2,88 2,2 ; 98.425,3.302 171.831,3.302 171.831,35.179 98.425,35.179 98.425,3.302
  text "POWER SUPPLY" at 142.163,30.977 h4
  text "ELECTRO SQUAD" at 8.981,9.668 h8
Bottom Overlay:
  lines w0.254: 2,2 173,2 173,88 2,88 2,2